# Altium PCB mcu.PcbDoc (part 2 of 2)
Units mil, origin at the board's own origin, x right, y up, seen from the top; angles counter-clockwise.
Board outline 3937.01 x 3937.01 mil, 2 copper layers (Top Layer, Bottom Layer); 92 components, 130 nets, 532 pads, 60 vias.
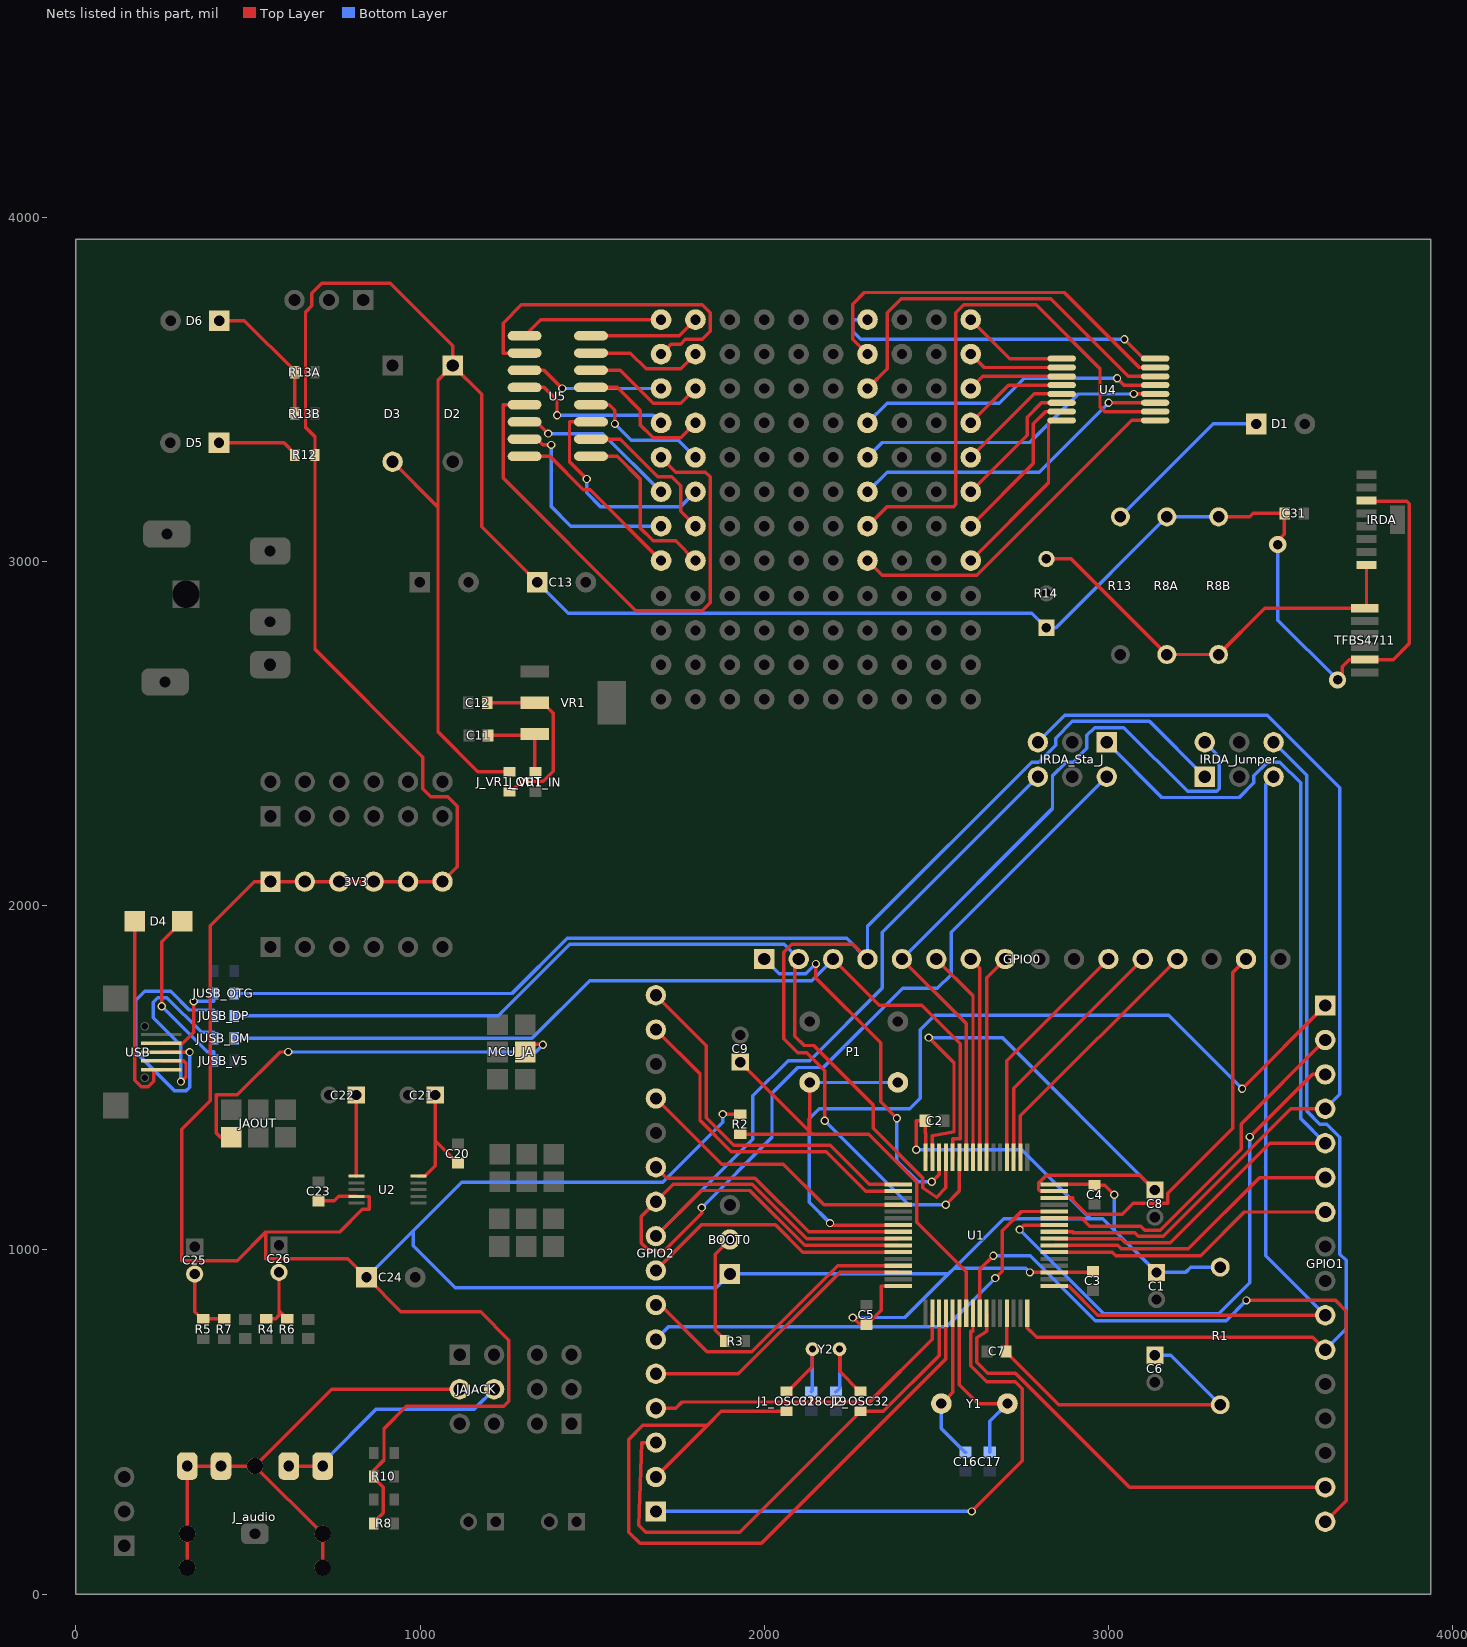
[diagram p2: the nets of this part, all layers, seen from the top]

## Via types
v1: diameter 24, hole 16, Top Layer to Bottom Layer, 58 vias
v2: diameter 50, hole 28, Top Layer to Bottom Layer, 2 vias

## Nets (pads, with @x,y where several pads share a name; then routed paths per layer and width w, separated by ;. In a path a pad name is that pad's centre, name@x,y a point inside that pad or via, vN(x,y) a via of type N, cw(c..) or ccw(c..) an arc to the next point about the centre after c; other vN are vias at no path point) (continued)
MCU_AOUTR: JAOUT.4 MCU_JA.5 | length 1230.8
  Top Layer w10: JAOUT.4@451.26,1327.56 420,1327.56 408,1339.56 408,1450.56 468.8,1450.56 593.24,1575 v1(617,1575) ; MCU_JA.5@1305,1575 1328,1598 1355,1598 v1(1357,1596)
  Bottom Layer w10: v1(617,1575) 1336,1575 v1(1357,1596)
NetBOOT0_2: BOOT0.2 R3.2 | length 324.2
  Top Layer w10: R3.2@1885.47,735 1885.47,738.94 1857.47,766.94 1857.47,987.47 BOOT0.2@1900,1030
NetC6_1: C6.1 C7.2 R1.2 U1.13 | length 1049.6
  Top Layer w10: U1.13@2704.96,816.26 2704.96,707.4 C7.2@2702.56,705 2702.56,703.03 2855.59,550 R1.2@3325,550
  Bottom Layer w10: C6.1@3135,693.74 3181.26,693.74 R1.2@3325,550
NetC8_1: C8.1 U1.31 U1.47 | length 1702.5
  Top Layer w10: v1(2478,1617) 2551.31,1543.69 2551.31,1343 2488.43,1331.43 U1.47@2488.43,1269.02 ; U1.31@2842.76,1170.59 2802.76,1170.59 2796.9,1176.45 2796.9,1193.8 2820.05,1216.95 3091.79,1216.95 C8.1@3135,1173.74
  Bottom Layer w10: v1(2478,1617) 2691.74,1617 C8.1@3135,1173.74
NetC11_2: C11.2 J_VR1_IN.2 VR1.3 | length 248.4
  Top Layer w10: C11.2@1197.56,2495 1328.35,2495 VR1.3@1332.8,2499.45 1332.8,2391.26 J_VR1_IN.2@1335,2389.06
NetC12_2: C12.2 J_VR1_OUT.1 VR1.2 | length 525.2
  Top Layer w10: C12.2@1195,2590 VR1.2@1332.8,2590 1356.42,2590 1387.13,2559.28 1387.13,2391.31 1358.1,2362.28 1295.74,2362.28 1263.94,2330.47 J_VR1_OUT.1@1260,2330.47
NetC20_2: C20.2 C21.1 U2.5 | length 359.3
  Top Layer w10: U2.5@995,1214.37 1013.05,1214.37 1043.74,1245.06 1043.74,1316.73 ; C21.1@1043.74,1450 1043.74,1316.73 ; C20.2@1110,1252.44 1108.03,1252.44 1043.74,1316.73
NetC22_1: C22.1 U2.6 | length 235.9
  Top Layer w10: C22.1@814.37,1450 815,1449.37 U2.6@815,1214.37
NetC25_2: C25.2 R5.2 R7.1 | length 204.1
  Top Layer w10: C25.2@345,930 345,820.59 366.06,799.53 R5.2@370,799.53 R7.1@431,799.53
NetC26_2: C26.2 R4.2 R6.1 | length 232.9
  Top Layer w10: R4.2@553,799.53 580,799.53 590,809.53 590,819.59 ; C26.2@590,935 590,823.53 ; 590,819.59 610.06,799.53 R6.1@614,799.53 590,823.53 ; 590,819.59 590,823.53
NetD1_1: D1.1 R13.2 | length 506.1
  Bottom Layer w10: R13.2@3035,3130 3305,3400 D1.1@3429.3,3400
NetD4_1: D4.1 USB.1 | length 586.5
  Top Layer w10: D4.1@171.1,1955 171.1,1492.84 189.44,1474.5 210.56,1474.5 225.5,1489.44 225.5,1523.54 225.58,1523.62 USB.1@247.56,1523.62
NetD4_2: D4.2 JUSB_V5.2 | length 504
  Top Layer w10: v1(249,1708) 249,1895.1 D4.2@308.9,1955
  Bottom Layer w10: v1(249,1708) 381,1576 400.47,1576 JUSB_V5.2@400.47,1550
NetD5_1: D5.1 R12.2 | length 236.6
  Top Layer w10: D5.1@415.7,3345 604.41,3345 635.47,3313.94 R12.2@635.47,3310
NetD6_1: D6.1 R13A.2 R13B.2 | length 403.5
  Top Layer w10: D6.1@416.4,3700 489.41,3700 635.47,3553.94 R13A.2@635.47,3550 R13B.2@635.47,3430
NetIRDA_8: IRDA.8 R8A.1 R8B.1 R14.3 TFBS4711.1 | length 1223.8
  Top Layer w10: R14.3@2820,3007.62 2892.38,3007.62 R8A.1@3170,2730 R8B.1@3320,2730 3454.61,2864.61 TFBS4711.1@3745,2864.61 3750,2869.61 IRDA.8@3750,2990.59
NetJ_audio_2: J_audio.0 J_audio.2 J_audio.3 JAJACK.3 | length 1556.4
  Top Layer w10: J_audio.0@323.15,76.57 J_audio.0@323.15,175 J_audio.2@323.15,371.85 J_audio.3@421.57,371.85 J_audio.0@520,371.85 ; J_audio.0@716.85,76.57 J_audio.0@716.85,175 J_audio.0@520,371.85 ; JAJACK.3@1115,595 743.15,595 J_audio.0@520,371.85
NetJ_audio_3: J_audio.4 J_audio.5 JAJACK.4 | length 694.9
  Top Layer w10: J_audio.4@618.43,371.85 J_audio.5@716.85,371.85
  Bottom Layer w10: J_audio.5@716.85,371.85 716.85,381.85 872.53,537.53 1157.53,537.53 JAJACK.4@1215,595
NetJUSB_DM_2: JUSB_DM.2 USB.2 | length 639.3
  Top Layer w10: USB.2@247.56,1549.21 312.4,1549.21 319.61,1542 319.61,1503.61 v1(305,1489)
  Bottom Layer w10: v1(305,1489) 305,1594 224,1675 224,1720 237,1733 264,1733 365,1632 400.47,1632 JUSB_DM.2@400.47,1615
NetJUSB_DP_2: JUSB_DP.2 USB.3 | length 817.4
  Top Layer w10: USB.3@247.56,1574.8 v1(330,1574.8)
  Bottom Layer w10: v1(330,1574.8) 330,1473 320,1463 286,1463 174,1575 174,1725 200,1751 275,1751 329,1697 400.47,1697 JUSB_DP.2@400.47,1680
NetJUSB_OTG_2: JUSB_OTG.2 USB.4 | length 278.8
  Top Layer w10: USB.4@247.56,1600.39 310,1600.39 342,1632.39 v1(342,1722)
  Bottom Layer w10: v1(342,1722) 400.47,1722 JUSB_OTG.2@400.47,1745
OSC32_IN: C18.2 J1_OSC32.2 Y2.1 | length 281
  Top Layer w10: J1_OSC32.2@2065,589.53 2068.94,589.53 2140,660.59 Y2.1@2140,711.65
  Bottom Layer w10: C18.2@2136.67,587.56 2140,590.89 Y2.1@2140,711.65
OSC32_OUT: C19.2 J2_OSC32.2 Y2.2 | length 278.2
  Top Layer w10: Y2.2@2218.74,711.65 2218.74,646.85 2276.06,589.53 J2_OSC32.2@2280,589.53
  Bottom Layer w10: C19.2@2208.33,587.56 2218.74,597.97 Y2.2@2218.74,711.65
OSC_IN: C16.2 U1.5 Y1.1 | length 447.7
  Top Layer w10: Y1.1@2514.57,553.35 2547.48,586.26 U1.5@2547.48,816.26
  Bottom Layer w10: Y1.1@2514.57,553.35 2514.57,481.03 2583.03,412.56 C16.2@2585,412.56
OSC_OUT: C17.2 U1.6 Y1.2 | length 532.5
  Top Layer w10: U1.6@2567.17,816.26 2567.17,608.27 2622.09,553.35 Y1.2@2706.69,553.35
  Bottom Layer w10: C17.2@2655,412.56 2655,501.65 Y1.2@2706.69,553.35
PA2: GPIO1.11 IRDA_Jumper.6 U1.16 | length 2824.5
  Top Layer w10: U1.16@2764.02,816.26 2764.02,773.03 2791.34,745.71 3594.29,745.71 GPIO1.11@3630,710
  Bottom Layer w10: IRDA_Jumper.6@3480,2475 3576.36,2378.64 3576.36,1403.5 3614.3,1365.56 3634.58,1365.56 3672.53,1327.62 3672.53,987.77 3690.53,969.77 3690.53,770.53 GPIO1.11@3630,710
PA3: GPIO1.10 IRDA_Jumper.5 U1.17 | length 2468.2
  Top Layer w10: U1.17@2842.76,895 2884.27,895 2969.27,810 GPIO1.10@3630,810
  Bottom Layer w10: IRDA_Jumper.5@3480,2375 3457.47,2352.47 3457.47,982.53 GPIO1.10@3630,810
PA6: GPIO1.7 U1.22 | length 843.8
  Top Layer w10: U1.22@2842.76,993.43 3011.09,993.43 3021.01,983.5 3267.82,983.5 3394.32,1110 GPIO1.7@3630,1110
PA7: GPIO1.6 U1.23 | length 877.2
  Top Layer w10: U1.23@2842.76,1013.11 3027.16,1013.11 3037.27,1003 3232.04,1003 3439.04,1210 GPIO1.6@3630,1210
PA8: GPIO0.6 U1.41 | length 620.1
  Top Layer w10: GPIO0.6@2500,1845 2606.54,1738.46 U1.41@2606.54,1269.02
PA9: GPIO0.5 IRDA_Jumper.2 U1.42 | length 2165.2
  Top Layer w10: GPIO0.5@2400,1845 2587.31,1657.69 2587.31,1309 2586.85,1309 U1.42@2586.85,1269.02
  Bottom Layer w10: GPIO0.5@2400,1845 2837.53,2282.53 2837.53,2377.67 2877.38,2417.53 2897.67,2417.53 2937.53,2457.38 2937.53,2494.97 2960.09,2517.53 3044.97,2517.53 3230.03,2332.47 3314.91,2332.47 3322.53,2340.09 3322.53,2432.47 IRDA_Jumper.2@3280,2475
PA10: GPIO0.4 IRDA_Jumper.1 JUSB_OTG.1 U1.43 | length 4763.2
  Top Layer w10: v1(2176,1375) 2176,1520 2123.32,1572.68 2097.32,1572.68 2057,1613 2057,1864.53 2080,1887.53 2257.47,1887.53 GPIO0.4@2300,1845 ; v1(2527.17,1131) 2567.17,1171 U1.43@2567.17,1269.02
  Bottom Layer w10: JUSB_OTG.1@459.53,1745 1266.99,1745 1427.52,1905.53 2239.47,1905.53 GPIO0.4@2300,1845 2300,1940.14 2777.38,2417.53 2797.67,2417.53 2846.53,2466.38 2846.53,2486.67 2895.38,2535.53 3119.47,2535.53 IRDA_Jumper.1@3280,2375 ; v1(2176,1375) 2420,1131 v1(2527.17,1131)
PA11: GPIO0.3 JUSB_DM.1 U1.44 | length 2658.4
  Top Layer w10: GPIO0.3@2200,1845 2333.89,1711.11 2457.29,1711.11 2569.31,1599.09 2569.31,1323.3 2548.17,1323.3 2548.17,1269.7 U1.44@2547.48,1269.02
  Bottom Layer w10: JUSB_DM.1@459.53,1615 1324.98,1615 1492.51,1782.53 2137.53,1782.53 GPIO0.3@2200,1845
PA12: GPIO0.2 JUSB_DP.1 U1.45 | length 2759.4
  Top Layer w10: GPIO0.2@2100,1845 2089,1834 2089,1621 2116.1,1593.9 2144.05,1593.9 2316.93,1421.03 2316.93,1352.88 2461,1208.8 2461,1180 2500.8,1153 2527.8,1180 U1.45@2527.8,1269.02
  Bottom Layer w10: JUSB_DP.1@459.53,1680 1227.44,1680 1434.97,1887.53 2057.47,1887.53 GPIO0.2@2100,1845
PA13: GPIO0.1 U1.46 | length 1055.6
  Top Layer w10: v1(2150,1831) 2150,1790 2338,1602 2338,1430 v1(2385.5,1382.5) ; v1(2487,1198) 2508.11,1219.11 U1.46@2508.11,1269.02
  Bottom Layer w10: GPIO0.1@2000,1845 2043,1802 2121,1802 v1(2150,1831) ; v1(2385.5,1382.5) 2385.5,1259.5 2447,1198 v1(2487,1198)
PA14: GPIO2.16 U1.49 | length 1055.4
  Top Layer w10: GPIO2.16@1685,1740 1831.26,1593.74 1831.26,1384.33 1911.92,1303.67 2192.1,1303.67 2305.49,1190.28 U1.49@2390,1190.28
PA15: GPIO2.15 U1.50 | length 978.4
  Top Layer w10: GPIO2.15@1685,1640 1813.26,1511.74 1813.26,1376.87 1904.47,1285.67 2179.73,1285.67 2294.81,1170.59 U1.50@2390,1170.59
PB0: GPIO1.3 U1.26 | length 1630.9
  Top Layer w10: v1(2742,1059) 2755.17,1072.17 U1.26@2842.76,1072.17 ; v1(3411,1328) 3593,1510 GPIO1.3@3630,1510
  Bottom Layer w10: v1(2742,1059) 2986,815 3321,815 3411,905 v1(3411,1328)
PB1: GPIO1.2 U1.27 | length 1073.9
  Top Layer w10: U1.27@2842.76,1091.85 2923.29,1091.85 2946.34,1068.8 3093.39,1068.8 3105.18,1057 3150.74,1057 3385.68,1291.94 3385.68,1365.68 GPIO1.2@3630,1610
PB2: GPIO1.1 U1.55 | length 2458.6
  Top Layer w10: v1(2191,1078) 2196.83,1072.17 U1.55@2390,1072.17 ; v1(3388.5,1468.5) GPIO1.1@3630,1710
  Bottom Layer w10: v1(2191,1078) 2131,1138 2131,1381 2160,1410 2423,1410 2453,1440 2453,1640 2495,1682 3175,1682 v1(3388.5,1468.5)
PB3: GPIO2.11 U1.56 | length 782.7
  Top Layer w10: GPIO2.11@1685,1240 1716.5,1208.53 1972.99,1208.53 2129.04,1052.48 U1.56@2390,1052.48
PB4: GPIO2.10 IRDA_Sta_J.2 U1.57 | length 3019.3
  Top Layer w10: v1(1818,1123) 1818,1106 1709,997 1665,997 1642,1020 1642,1097 GPIO2.10@1685,1140 1735.53,1190.53 1965.54,1190.53 2123.27,1032.8 U1.57@2390,1032.8
  Bottom Layer w10: v1(1818,1123) 2022.54,1327.54 2022.54,1455.32 2097.22,1530 2172,1530 2402,1760 2503,1760 2543,1800 2543,1923 IRDA_Sta_J.2@2995,2375
PB5: GPIO2.9 IRDA_Sta_J.6 U1.58 | length 2657.6
  Top Layer w10: GPIO2.9@1685,1040 1817.53,1172.53 1958.08,1172.53 2117.5,1013.11 U1.58@2390,1013.11
  Bottom Layer w10: GPIO2.9@1685,1040 1966.5,1321.5 1966.5,1447.44 2069.18,1550.12 2132.12,1550.12 2343,1761 2343,1923 IRDA_Sta_J.6@2795,2375
PB6: GPIO2.8 U1.59 | length 792.7
  Top Layer w10: GPIO2.8@1685,940 1817.53,1072.53 2032.62,1072.53 2111.73,993.43 U1.59@2390,993.43
PB7: GPIO2.7 U1.61 | length 864.7
  Top Layer w10: GPIO2.7@1685,840 1697.9,840 1833.62,704.28 1963.69,704.28 2213.46,954.06 U1.61@2390,954.06
PB8: GPIO2.6 U1.28 | length 1380.3
  Top Layer w10: v1(2671,918) 2691,938 2691,1055.17 2747.37,1111.54 U1.28@2842.76,1111.54
  Bottom Layer w10: GPIO2.6@1685,740 1721,776 2529,776 v1(2671,918)
PB9: GPIO2.5 U1.62 | length 826.9
  Top Layer w10: GPIO2.5@1685,640 1924.86,640 2219.23,934.37 U1.62@2390,934.37
PB11: GPIO0.15 U1.30 | length 1170.5
  Top Layer w10: U1.30@2842.76,1150.91 2896,1150.91 2896,1144.59 2936.9,1103.69 3040.69,1103.69 3072,1135 3173,1135 3173,1165 3361,1353 3361,1806 GPIO0.15@3400,1845
PB13: GPIO0.13 U1.34 | length 764.7
  Top Layer w10: U1.34@2744.33,1269.02 2744.33,1389.33 GPIO0.13@3200,1845
PB14: GPIO0.12 U1.35 | length 731.5
  Top Layer w10: U1.35@2724.65,1269.02 2724.65,1469.65 GPIO0.12@3100,1845
PB15: GPIO0.11 U1.36 | length 698.2
  Top Layer w10: U1.36@2704.96,1269.02 2704.96,1549.96 GPIO0.11@3000,1845
PC0: GPIO2.1 U1.8 | length 1671.3
  Top Layer w10: v1(2603,240) 2749.69,386.69 2749.69,596 2728.99,616.7 2647,616.7 2600,663.7 2600,763 2606,763 2606.54,763.54 U1.8@2606.54,816.26
  Bottom Layer w10: GPIO2.1@1685,240 v1(2603,240)
PC1: GPIO1.16 U1.9 | length 1961.1
  Top Layer w10: U1.9@2626.22,816.26 2626.22,943.22 v1(2666,983) ; v1(3401,853) 3660,853 3691,822 3691,271 GPIO1.16@3630,210
  Bottom Layer w10: v1(2666,983) 2773,983 2962,794 3342,794 v1(3401,853)
PC2: GPIO1.15 U1.10 | length 1320.9
  Top Layer w10: U1.10@2645.91,816.26 2645.91,763 2618,745.26 2618,673 2649.7,641.3 2730.11,641.3 3061.4,310 GPIO1.15@3630,310
PC4: GPIO1.5 IRDA_Sta_J.1 U1.24 | length 2697.9
  Top Layer w10: U1.24@2842.76,1032.8 2883,1032.8 2883.69,1032.11 3037.44,1032.11 3048.55,1021 3180,1021 3469,1310 GPIO1.5@3630,1310
  Bottom Layer w10: IRDA_Sta_J.1@2995,2475 3155.53,2314.47 3379.62,2314.47 3422.53,2357.38 3422.53,2377.67 3462.38,2417.53 3497.62,2417.53 3558.36,2356.79 3558.36,1381.64 GPIO1.5@3630,1310
PC5: GPIO1.4 IRDA_Sta_J.5 U1.25 | length 2895.5
  Top Layer w10: U1.25@2842.76,1052.48 2897,1052.48 2897,1050.11 3076.07,1050.11 3087.18,1039 3159,1039 3530,1410 GPIO1.4@3630,1410
  Bottom Layer w10: IRDA_Sta_J.5@2795,2475 2873.53,2553.53 3461.62,2553.53 3672.53,2342.62 3672.53,1452.53 GPIO1.4@3630,1410
PC8: GPIO0.8 U1.39 | length 598.4
  Top Layer w10: U1.39@2645.91,1269.02 2645.91,1790.91 GPIO0.8@2700,1845
PC9: GPIO0.7 U1.40 | length 586.8
  Top Layer w10: GPIO0.7@2600,1845 2626.22,1818.78 U1.40@2626.22,1269.02
PC11: GPIO2.13 U1.52 | length 832.9
  Top Layer w10: GPIO2.13@1685,1440 1876,1249 2055.75,1249 2173.53,1131.22 U1.52@2390,1131.22
PC13: GPIO2.4 U1.2 | length 962.1
  Top Layer w10: GPIO2.4@1685,540 1743,540 1761,558 2305.68,558 2488.43,740.75 U1.2@2488.43,816.26
PC14: GPIO2.3 J2_OSC32.1 U1.3 | length 1499.1
  Top Layer w10: GPIO2.3@1685,440 1644,440 1635,200 1656,179 1928.53,179 J2_OSC32.1@2280,530.47 2345.58,530.47 2508.11,693 U1.3@2508.11,816.26
PC15: GPIO2.2 J1_OSC32.1 U1.4 | length 2264.7
  Top Layer w10: GPIO2.2@1685,340 1835,490 ; J1_OSC32.1@2065,530.47 1875.47,530.47 1835,490 ; U1.4@2527.8,816.26 2527.8,682.8 1992,147 1639,147 1606,180 1606,449 1647,490 1835,490
RESET: C9.1 P1.1 P1.2 R2.1 U1.7 | length 1706.2
  Top Layer w10: R2.1@1930,1335.47 2140.16,1335.47 ; C9.1@1930,1545.63 2132.05,1343.58 ; P1.2@2132.05,1486.42 2132.05,1343.58 ; U1.7@2586.85,816.26 2586.85,936.15 2443,1080 2443,1196.28 2303.8,1335.47 2140.16,1335.47 ; 2132.05,1343.58 2140.16,1335.47
  Bottom Layer w10: P1.2@2132.05,1486.42 P1.1@2387.95,1486.42
so0: pad.12@1700,3703 U5.1 | length 415.9
  Top Layer w10: U5.1@1303.54,3656 1350.54,3703 pad.12@1700,3703
so1: pad.12@1700,3603 U5.2 | length 1007.4
  Top Layer w10: U5.2@1303.54,3606 1241,3606 1241,3693 1294,3746 1820,3746 1843,3723 1843,3669 1820,3646 1771,3646 1757,3632 1729,3632 pad.12@1700,3603
so2: pad.12@1700,3503 U5.3 | length 418.4
  Top Layer w10: U5.3@1303.54,3556 1360,3556 v1(1413,3503)
  Bottom Layer w10: v1(1413,3503) pad.12@1700,3503
so3: pad.12@1700,3403 U5.4 | length 464.3
  Top Layer w10: U5.4@1303.54,3506 1360,3506 1397.76,3468.24 v1(1397.76,3425.33)
  Bottom Layer w10: v1(1397.76,3425.33) 1677.67,3425.33 pad.12@1700,3403
so4: pad.12@1700,3303 U5.5 | length 1579.6
  Top Layer w10: U5.5@1303.54,3456 1241,3456 1241,3243 1627,2857 1820,2857 1843,2880 1843,3246 1829,3260 1743,3260 pad.12@1700,3303
so5: pad.12@1700,3203 U5.6 | length 480.5
  Top Layer w10: U5.6@1303.54,3406 1338,3406 v1(1372,3372)
  Bottom Layer w10: v1(1372,3372) 1531,3372 pad.12@1700,3203
so6: pad.12@1700,3103 U5.7 | length 606.1
  Top Layer w10: U5.7@1303.54,3356 1339,3356 1356,3339 v1(1381,3339)
  Bottom Layer w10: v1(1381,3339) 1381,3160 1438,3103 pad.12@1700,3103
so7: pad.12@1700,3003 U5.8 | length 522
  Top Layer w10: U5.8@1303.54,3306 1377.37,3306 1474.14,3209.24 1493.76,3209.24 pad.12@1700,3003
so8: pad.3@1800,3003 U5.9 | length 512.2
  Top Layer w10: U5.9@1496.46,3306 1573,3306 1639,3240 1639,3098 1677,3060 1743,3060 pad.3@1800,3003
so9: pad.3@1800,3103 U5.10 | length 451.7
  Top Layer w10: U5.10@1496.46,3356 1581,3356 1691,3246 1731,3246 1757,3220 1757,3146 pad.3@1800,3103
so10: pad.3@1800,3203 U5.11 | length 639.5
  Top Layer w10: v1(1484,3240) 1434,3290 1434,3406 U5.11@1496.46,3406
  Bottom Layer w10: v1(1484,3240) 1484,3200 1524,3160 1757,3160 pad.3@1800,3203
so11: pad.3@1800,3303 U5.12 | length 390.4
  Top Layer w10: U5.12@1496.46,3456 1550,3456 1566,3440 v1(1566,3400)
  Bottom Layer w10: v1(1566,3400) 1613,3353 1750,3353 pad.3@1800,3303
so12: pad.3@1800,3403 U5.13 | length 406.4
  Top Layer w10: U5.13@1496.46,3506 1573,3506 1639,3440 1639,3398 1677,3360 1757,3360 pad.3@1800,3403
so13: pad.3@1800,3503 U5.14 | length 361.1
  Top Layer w10: U5.14@1496.46,3556 1581,3556 1677,3460 1757,3460 pad.3@1800,3503
so14: pad.3@1800,3603 U5.15 | length 340.4
  Top Layer w10: U5.15@1496.46,3606 1611,3606 1657,3560 1757,3560 pad.3@1800,3603
so15: pad.3@1800,3703 U5.16 | length 323
  Top Layer w10: U5.16@1496.46,3656 1753,3656 pad.3@1800,3703
ssop0: pad.11@2600,3703 U4.1 | length 311.2
  Top Layer w10: pad.11@2600,3703 2713.43,3589.57 U4.1@2864.17,3589.57
ssop1: pad.11@2600,3603 U4.2 | length 280.3
  Top Layer w10: pad.11@2600,3603 2639.02,3563.98 U4.2@2864.17,3563.98
ssop2: pad.11@2600,3503 U4.3 | length 278.8
  Top Layer w10: pad.11@2600,3503 2635.39,3538.39 U4.3@2864.17,3538.39
ssop3: pad.11@2600,3403 U4.4 | length 309.7
  Top Layer w10: pad.11@2600,3403 2709.8,3512.8 U4.4@2864.17,3512.8
ssop4: pad.11@2600,3303 U4.5 | length 340.5
  Top Layer w10: pad.11@2600,3303 2784.2,3487.2 U4.5@2864.17,3487.2
ssop5: pad.11@2600,3203 U4.6 | length 402.3
  Top Layer w10: pad.11@2600,3203 2764,3367 2764,3420 2805.61,3461.61 U4.6@2864.17,3461.61
ssop6: pad.11@2600,3103 U4.7 | length 469.5
  Top Layer w10: pad.11@2600,3103 2782,3285 2782,3400 2818.02,3436.02 U4.7@2864.17,3436.02
ssop7: pad.11@2600,3003 U4.8 | length 539.2
  Top Layer w10: pad.11@2600,3003 2826,3229 2826,3410.43 U4.8@2864.17,3410.43
ssop8: pad.8@2300,3003 U4.9 | length 1040.2
  Top Layer w10: pad.8@2300,3003 2343,2960 2618,2960 3068.43,3410.43 U4.9@3135.83,3410.43
ssop9: pad.8@2300,3103 U4.10 | length 1620.9
  Top Layer w10: pad.8@2300,3103 2357,3160 2550,3160 2557,3167 2557,3723 2580,3746 2790,3746 2975.61,3560.39 2975.61,3450 2989.59,3436.02 U4.10@3135.83,3436.02
ssop10: pad.8@2300,3203 U4.11 | length 942.9
  Top Layer w10: v1(3000.61,3461.61) U4.11@3135.83,3461.61
  Bottom Layer w10: pad.8@2300,3203 2357,3260 2799,3260 v1(3000.61,3461.61)
ssop11: pad.8@2300,3303 U4.12 | length 912.1
  Top Layer w10: v1(3074,3487) 3074.2,3487.2 U4.12@3135.83,3487.2
  Bottom Layer w10: pad.8@2300,3303 2343,3346 2771,3346 2912,3487 v1(3074,3487)
ssop12: pad.8@2300,3403 U4.13 | length 898
  Top Layer w10: v1(3025,3533) 3045.2,3512.8 U4.13@3135.83,3512.8
  Bottom Layer w10: pad.8@2300,3403 2357,3460 2683,3460 2756,3533 v1(3025,3533)
ssop13: pad.8@2300,3503 U4.14 | length 1132.9
  Top Layer w10: pad.8@2300,3503 2357,3560 2357,3723 2398,3764 2832.1,3764 3057.71,3538.39 U4.14@3135.83,3538.39
ssop14: pad.8@2300,3603 U4.15 | length 1146
  Top Layer w10: pad.8@2300,3603 2257,3646 2257,3748 2291,3782 2871.98,3782 3090,3563.98 U4.15@3135.83,3563.98
ssop15: pad.8@2300,3703 U4.16 | length 988.7
  Top Layer w10: v1(3046.57,3646) 3103,3589.57 U4.16@3135.83,3589.57
  Bottom Layer w10: pad.8@2300,3703 2257,3703 2257,3669 2280,3646 v1(3046.57,3646)
VCC: 3V3.1 3V3.2 3V3.3 3V3.4 3V3.5 3V3.6 BOOT0.1 C1.1 C2.2 C3.2 C4.2 C5.2 C13.1 C23.2 C24.1 C31.2 D2.2 D3.1 IRDA.3 J_VR1_OUT.2 R1.1 R2.2 R8.1 R8A.2 R8B.2 R10.1 R12.1 R14.1 TFBS4711.5 U1.19 U1.32 U1.48 U1.64 U2.9 | length 18725.7
  Top Layer w10: C23.2@705,1142.44 750.89,1142.44 763.77,1155.32 U2.9@815,1155.32 851.62,1154 851.62,1118 832,1118 766,1052 552,1052 ; R8.1@865.47,205 865.47,208 893,235.53 893,310.47 865.47,338 R10.1@865.47,341.67 865.47,360 895,389.53 895,480 960,545 1243,545 1258,560 1258,738 1176,820 944.3,820 C24.1@844.3,920 790.3,974 552,974 552,1052 ; D3.1@920,3290.24 1052,3158.24 ; J_VR1_OUT.2@1260,2389.53 1168,2389.53 1052,2505.53 1052,3158.24 ; C13.1@1340,2940 1179,3101 1179,3485.76 D2.2@1095,3569.76 ; v1(1879.36,1394.53) R2.2@1930,1394.53 ; v1(2257,803.44) 2277,783.44 C5.2@2297,783.44 2298.97,783.44 2340,824.47 2340,894 2341,895 U1.64@2390,895 ; v1(2442,1291) 2442,1375 C2.2@2467.44,1375 2467.44,1340.02 2468.74,1338.72 U1.48@2468.74,1269.02 ; v1(2772,934.37) U1.19@2842.76,934.37 2951.81,934.37 C3.2@2955,937.56 ; U1.32@2842.76,1190.28 2957.28,1190.28 C4.2@2960,1187.56 2989.44,1187.56 v1(3017,1160) ; R8B.2@3320,3130 3411,3130 3421,3140 C31.2@3510.91,3140 ; v2(3492.06,3049.33) 3492.06,3060.15 3510.91,3079 C31.2@3510.91,3140 ; C31.2@3510.91,3141.09 C31.2@3510.91,3140 ; v2@3679,2666 3679,2694.2 3700,2715.2 TFBS4711.5@3745,2715.2 3827.87,2715.2 3874.65,2761.98 3874.65,3168.22 3867.04,3175.83 3750,3175.83 IRDA.3@3750,3177.6 ; 552,1052 469,969 307,969 307,1350 389.92,1432.92 389.92,1941.92 518,2070 3V3.1@565,2070 3V3.2@665,2070 3V3.3@765,2070 3V3.4@865,2070 3V3.5@965,2070 3V3.6@1065,2070 1108,2113 1108,2289 1080,2317 1031,2317 1008,2340 1008,2432 694.53,2745.47 R12.1@694.53,3310 694.53,3362.47 667,3390 667,3725 685,3743 685,3780 714,3809 913,3809 1095,3627 D2.2@1095,3569.76 ; 1052,3158.24 1052,3526.76 D2.2@1095,3569.76
  Bottom Layer w10: C24.1@844.3,920 980,1055.7 ; C13.1@1340,2940 1430,2850 2777.62,2850 R14.1@2820,2807.62 2847.62,2807.62 R8A.2@3170,3130 R8B.2@3320,3130 ; v1(1879.36,1394.53) 1879.36,1371.36 1705,1197 1121.3,1197 980,1055.7 ; v1(2257,803.44) 2408.44,803.44 2535,930 ; v1(2442,1291) 2748,1291 2948,1091 ; v1(2772,934.37) 2759.34,947.03 2552.03,947.03 ; v1(3017,1160) 3017,1057.37 ; R1.1@3325,950 3239.63,950 3224,934.37 C1.1@3140,934.37 3017,1057.37 ; v2(3492.06,3049.33) 3492.06,2830.15 v2(3665.94,2656.28) 3666.82,2655.4 v2@3670.52,2655.4 ; 980,1055.7 980,1012 1102,890 1860,890 BOOT0.1@1900,930 2535,930 ; 2535,930 2552.03,947.03 ; 2552.03,947.03 2696,1091 2948,1091 ; 2948,1091 2983.37,1091 3017,1057.37
pads on no net: J1.4 J1.5 J1.6 PWRJ5.3 U1.1 U1.54 USB. USB.MH1 USB.MH2 VR1.4
copper on no net: | length 7.1
  Bottom Layer w10: 1080,4470 1085,4475

## Polygon pours and split planes (outlines as drawn)
GND on Top Layer "Top Layer-No Net" (solid, pour order 0): 0,0 0,3937.01 3937.01,3937.01 3937.01,0
GND on Bottom Layer "Top Layer-No Net1" (solid, pour order 1): 0,0 0,3937.01 3937.01,3937.01 3937.01,0

## Other copper
Top Layer:
  text "Created By" at 1666.46,2423.91 h60
  text "Changhai Man" at 1666.41,2285.86 h80
  text "Ir Transmitt" at 1666.46,2149.62 h60
  text "Ver 1.0" at 2390.18,2149.62 h60

## Silkscreen, mask and mechanical layers (free items; w line width, h text height)
Top Overlay:
  text "SHOT" at 2485,2455 h60
  text "C" at 3075,2450 h60
  text "TX" at 3550,2450 h60
  text "SD" at 2605,2355 h60
  text "RX" at 3555,2350 h60
  text "B" at 3075,2345 h60
  text "UART1" at 3245,2305 h60 r270
  text "UART2" at 3460,2305 h60 r270
  text "5" at 2770,2300 h60 r270
  text "4" at 2975,2300 h60 r270
  text "IRDA" at 3355,2300 h60 r270
  text "A13A12A11A10A9 A8 C9 C8 C7 C6 B15B14B13B12B11B10" at 1961,1917 h35
  text "A14" at 1511,1712 h40
  text "B2" at 3701,1691 h40
  text "A15" at 1511,1612.07 h40
  text "B1" at 3701,1591.07 h40
  text "C10" at 1511,1512.13 h40
  text "B0" at 3701,1491.13 h40
  text "C11" at 1524.33,1412.2 h40
  text "C5" at 3701,1391.2 h40
  text "C12" at 1511,1312.27 h40
  text "C4" at 3701,1291.27 h40
  text "B3" at 1544.32,1212.33 h40
  text "A7" at 3701,1191.33 h40
  text "B4" at 1544.32,1112.4 h40
  text "0" at 1975,1100 h60
  text "A6" at 3701,1091.4 h40
  text "B5" at 1544.32,1012.47 h40
  text "A5" at 3701,991.47 h40
  text "B6" at 1544.32,912.53 h40
  text "1" at 1995,900 h60
  text "A4" at 3701,891.53 h40
  text "B7" at 1544.32,812.6 h40
  text "A3" at 3701,791.6 h40
  text "A" at 1452,757 h40
  text "B8" at 1544.32,712.67 h40
  text "A2" at 3701,691.67 h40
  text "OUT" at 890,665 h60
  text "B9" at 1544.32,612.73 h40
  text "A1" at 3701,591.73 h40
  text "C13" at 1511,512.8 h40
  text "A0" at 3701,491.8 h40
  text "IN" at 950,465 h60
  text "C14" at 1511,412.87 h40
  text "C3" at 3701,391.87 h40
  text "BIA" at 1369,384 h40
  text "BIA" at 1372,384 h40
  text "C15" at 1511,312.93 h40
  text "C2" at 3701,291.93 h40
  text "C0" at 1544.32,213 h40
  text "C1" at 3701,192 h40
Mechanical 1:
  lines w10: 0,0 3937.01,0 ; 0,0 0,3937.01 ; 0,0 0,3937.01 ; 0,0 3937.01,0 ; 0,0 0,3937.01 ; 0,0 3937.01,0 ; 0,3937.01 3937.01,3937.01 ; 0,3937.01 3937.01,3937.01 ; 0,3937.01 3937.01,3937.01 ; 3937.01,0 3937.01,3937.01 ; 3937.01,0 3937.01,3937.01 ; 3937.01,0 3937.01,3937.01
Mechanical 5:
  lines w10: 0,0 3937.01,0 ; 0,0 3937.01,0 ; 0,0 3937.01,0 ; 0,0 3937.01,0 ; 0,0 3937.01,0 ; 0,0 3937.01,0 ; 0,0 3937.01,0 ; 0,0 3937.01,0 ; 0,0 3937.01,0 ; 0,0 3937.01,0 ; 0,0 3937.01,0 ; 0,0 3937.01,0 ; 0,0 3937.01,0 ; 0,0 3937.01,0 ; 0,0 3937.01,0 ; 0,0 0,3937.01 ; 0,0 0,3937.01 ; 0,0 0,3937.01 ; 0,0 0,3937.01 ; 0,0 0,3937.01 ; 0,0 0,3937.01 ; 0,0 0,3937.01 ; 0,0 0,3937.01 ; 0,0 0,3937.01 ; 0,0 0,3937.01 ; 0,0 0,3937.01 ; 0,0 0,3937.01 ; 0,0 0,3937.01 ; 0,0 0,3937.01 ; 0,0 0,3937.01 ; 0,3937.01 3937.01,3937.01 ; 0,3937.01 3937.01,3937.01 ; 0,3937.01 3937.01,3937.01 ; 0,3937.01 3937.01,3937.01 ; 0,3937.01 3937.01,3937.01 ; 0,3937.01 3937.01,3937.01 ; 0,3937.01 3937.01,3937.01 ; 0,3937.01 3937.01,3937.01 ; 0,3937.01 3937.01,3937.01 ; 0,3937.01 3937.01,3937.01 ; 0,3937.01 3937.01,3937.01 ; 0,3937.01 3937.01,3937.01 ; 0,3937.01 3937.01,3937.01 ; 0,3937.01 3937.01,3937.01 ; 0,3937.01 3937.01,3937.01 ; 3937.01,0 3937.01,3937.01 ; 3937.01,0 3937.01,3937.01 ; 3937.01,0 3937.01,3937.01 ; 3937.01,0 3937.01,3937.01 ; 3937.01,0 3937.01,3937.01 ; 3937.01,0 3937.01,3937.01 ; 3937.01,0 3937.01,3937.01 ; 3937.01,0 3937.01,3937.01 ; 3937.01,0 3937.01,3937.01 ; 3937.01,0 3937.01,3937.01 ; 3937.01,0 3937.01,3937.01 ; 3937.01,0 3937.01,3937.01 ; 3937.01,0 3937.01,3937.01 ; 3937.01,0 3937.01,3937.01 ; 3937.01,0 3937.01,3937.01
Mechanical 7:
  lines w10: 0,0 3937.01,0 ; 0,0 3937.01,0 ; 0,0 3937.01,0 ; 0,0 3937.01,0 ; 0,0 3937.01,0 ; 0,0 3937.01,0 ; 0,0 0,3937.01 ; 0,0 0,3937.01 ; 0,0 0,3937.01 ; 0,0 0,3937.01 ; 0,0 0,3937.01 ; 0,0 0,3937.01 ; 0,3937.01 3937.01,3937.01 ; 0,3937.01 3937.01,3937.01 ; 0,3937.01 3937.01,3937.01 ; 0,3937.01 3937.01,3937.01 ; 0,3937.01 3937.01,3937.01 ; 0,3937.01 3937.01,3937.01 ; 3937.01,0 3937.01,3937.01 ; 3937.01,0 3937.01,3937.01 ; 3937.01,0 3937.01,3937.01 ; 3937.01,0 3937.01,3937.01 ; 3937.01,0 3937.01,3937.01 ; 3937.01,0 3937.01,3937.01
Mechanical 13:
  lines w10: 0,0 3937.01,0 ; 0,0 3937.01,0 ; 0,0 3937.01,0 ; 0,0 0,3937.01 ; 0,0 0,3937.01 ; 0,0 0,3937.01 ; 0,3937.01 3937.01,3937.01 ; 0,3937.01 3937.01,3937.01 ; 0,3937.01 3937.01,3937.01 ; 3937.01,0 3937.01,3937.01 ; 3937.01,0 3937.01,3937.01 ; 3937.01,0 3937.01,3937.01
Mechanical 15:
  lines w10: 0,0 3937.01,0 ; 0,0 3937.01,0 ; 0,0 3937.01,0 ; 0,0 0,3937.01 ; 0,0 0,3937.01 ; 0,0 0,3937.01 ; 0,0 3937.01,0 ; 0,0 3937.01,0 ; 0,0 3937.01,0 ; 0,0 0,3937.01 ; 0,0 0,3937.01 ; 0,0 0,3937.01 ; 0,3937.01 3937.01,3937.01 ; 0,3937.01 3937.01,3937.01 ; 0,3937.01 3937.01,3937.01 ; 0,3937.01 3937.01,3937.01 ; 0,3937.01 3937.01,3937.01 ; 0,3937.01 3937.01,3937.01 ; 3937.01,0 3937.01,3937.01 ; 3937.01,0 3937.01,3937.01 ; 3937.01,0 3937.01,3937.01 ; 3937.01,0 3937.01,3937.01 ; 3937.01,0 3937.01,3937.01 ; 3937.01,0 3937.01,3937.01

## Text inside footprints (layer, text, board x,y; h text height)
GND: Top Overlay "12" at 1145,2340 h50; Top Overlay "1" at 1185,2240 h50; Top Overlay "1" at 1145,2240 h50; Top Overlay "1" at 465,2240 h50; Top Overlay "2" at 465,2340 h50
JAJACK: Top Overlay "L" at 1195,795 h50 r270; Top Overlay "R" at 1095,795 h50 r270
U1: Mechanical 7 "0.453in/11.5mm" at 2971.26,955.14 h25 r90; Mechanical 7 "0.453in/11.5mm" at 2628.88,1357.52 h25 r90; Mechanical 7 "0.02in/0.5mm" at 2491.08,577.76 h25 r90; Mechanical 7 "Alt 2 Padstyle: OX90Y60D30P" at 3366.26,705.14 h50 r90; Mechanical 7 "Alt 1 Padstyle: OX60Y90D30P" at 3306.26,705.14 h50 r90; Mechanical 7 "Default Padstyle: RX47Y12D0T" at 3126.26,692.64 h50 r90